# EAGLE board transf_auto6 (EAGLE 5.04)
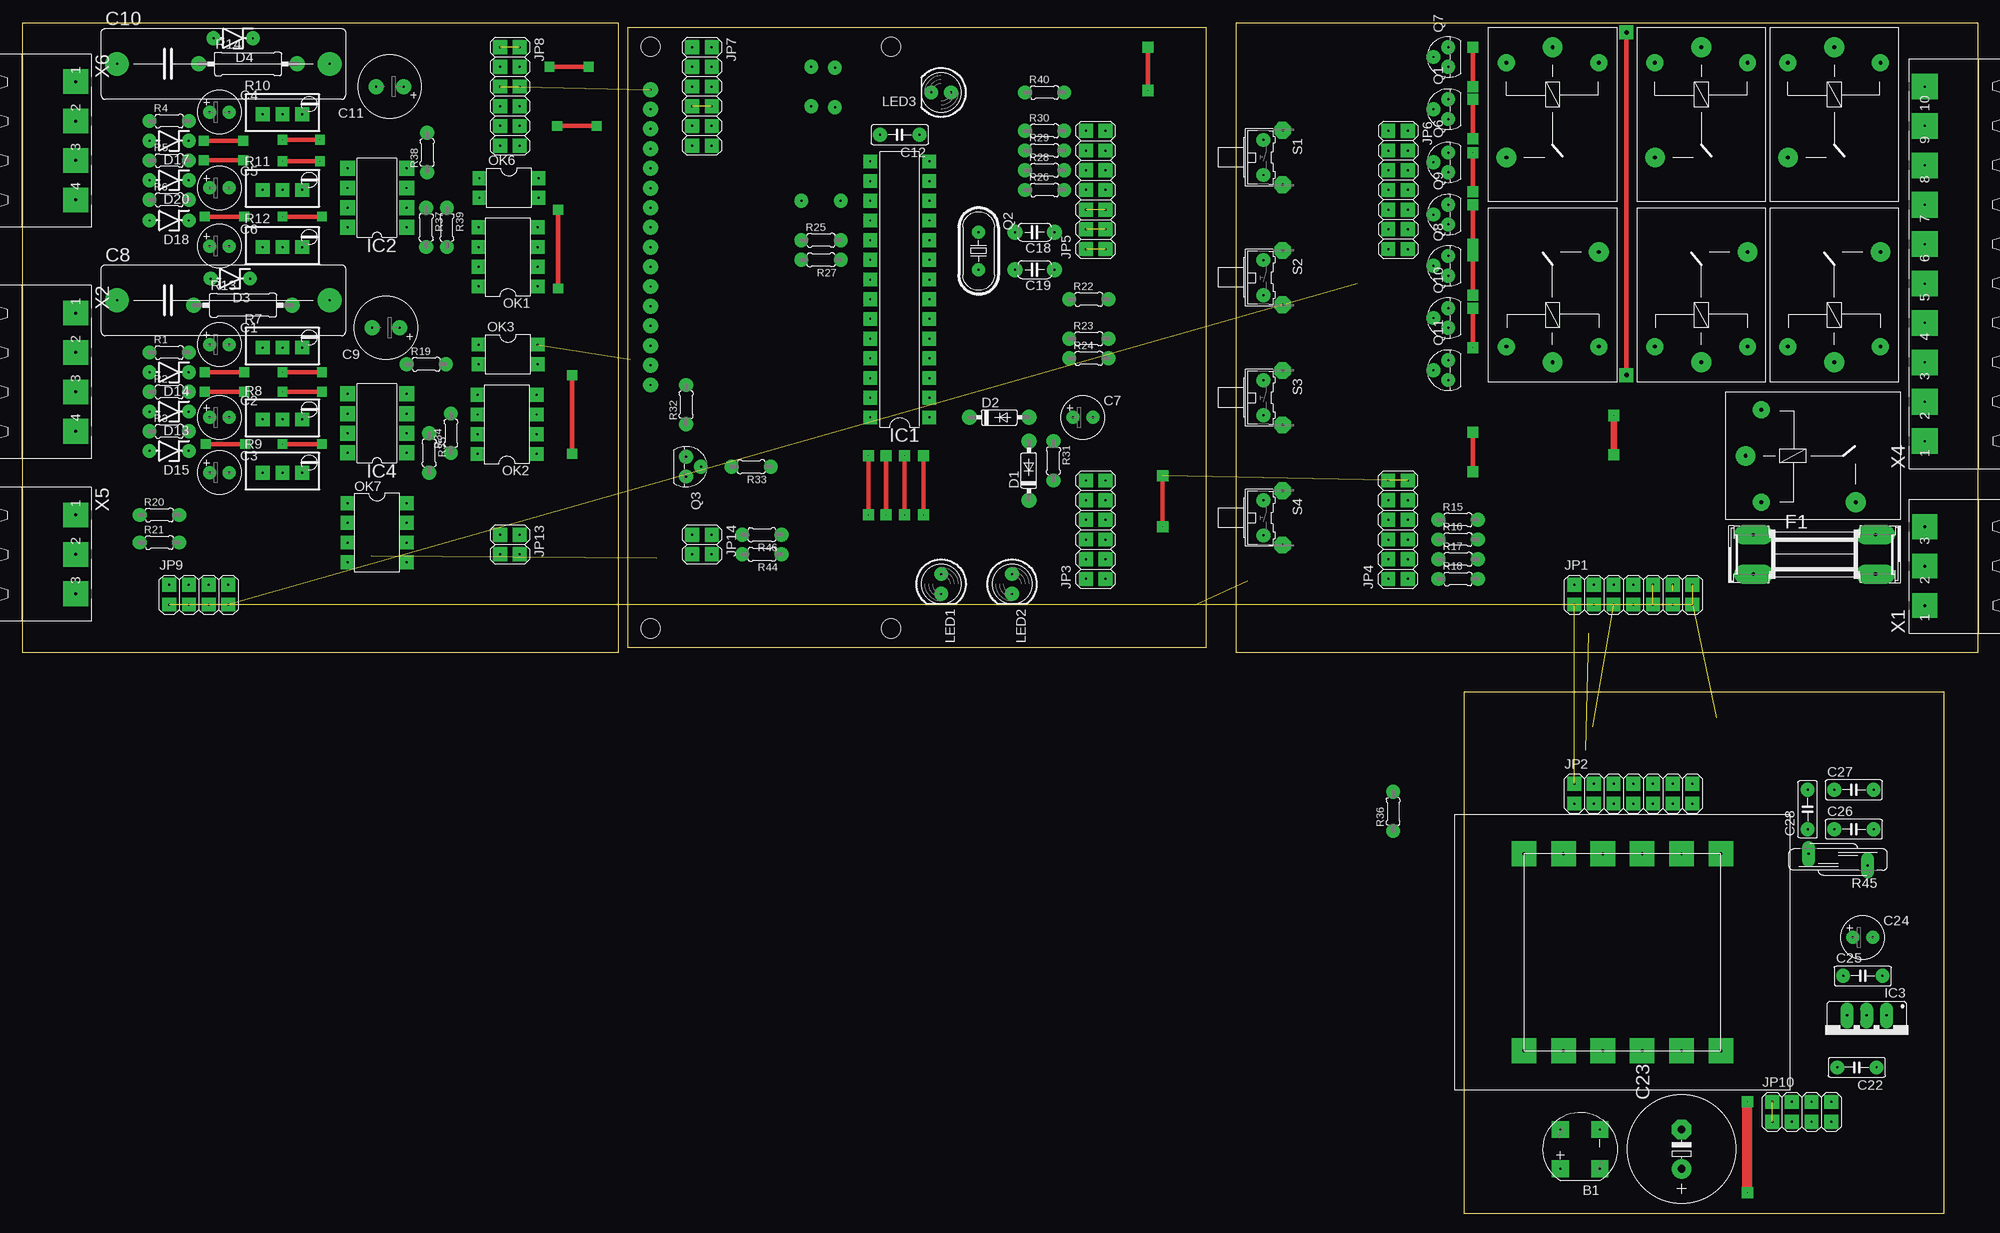
[diagram p0: board, top side]
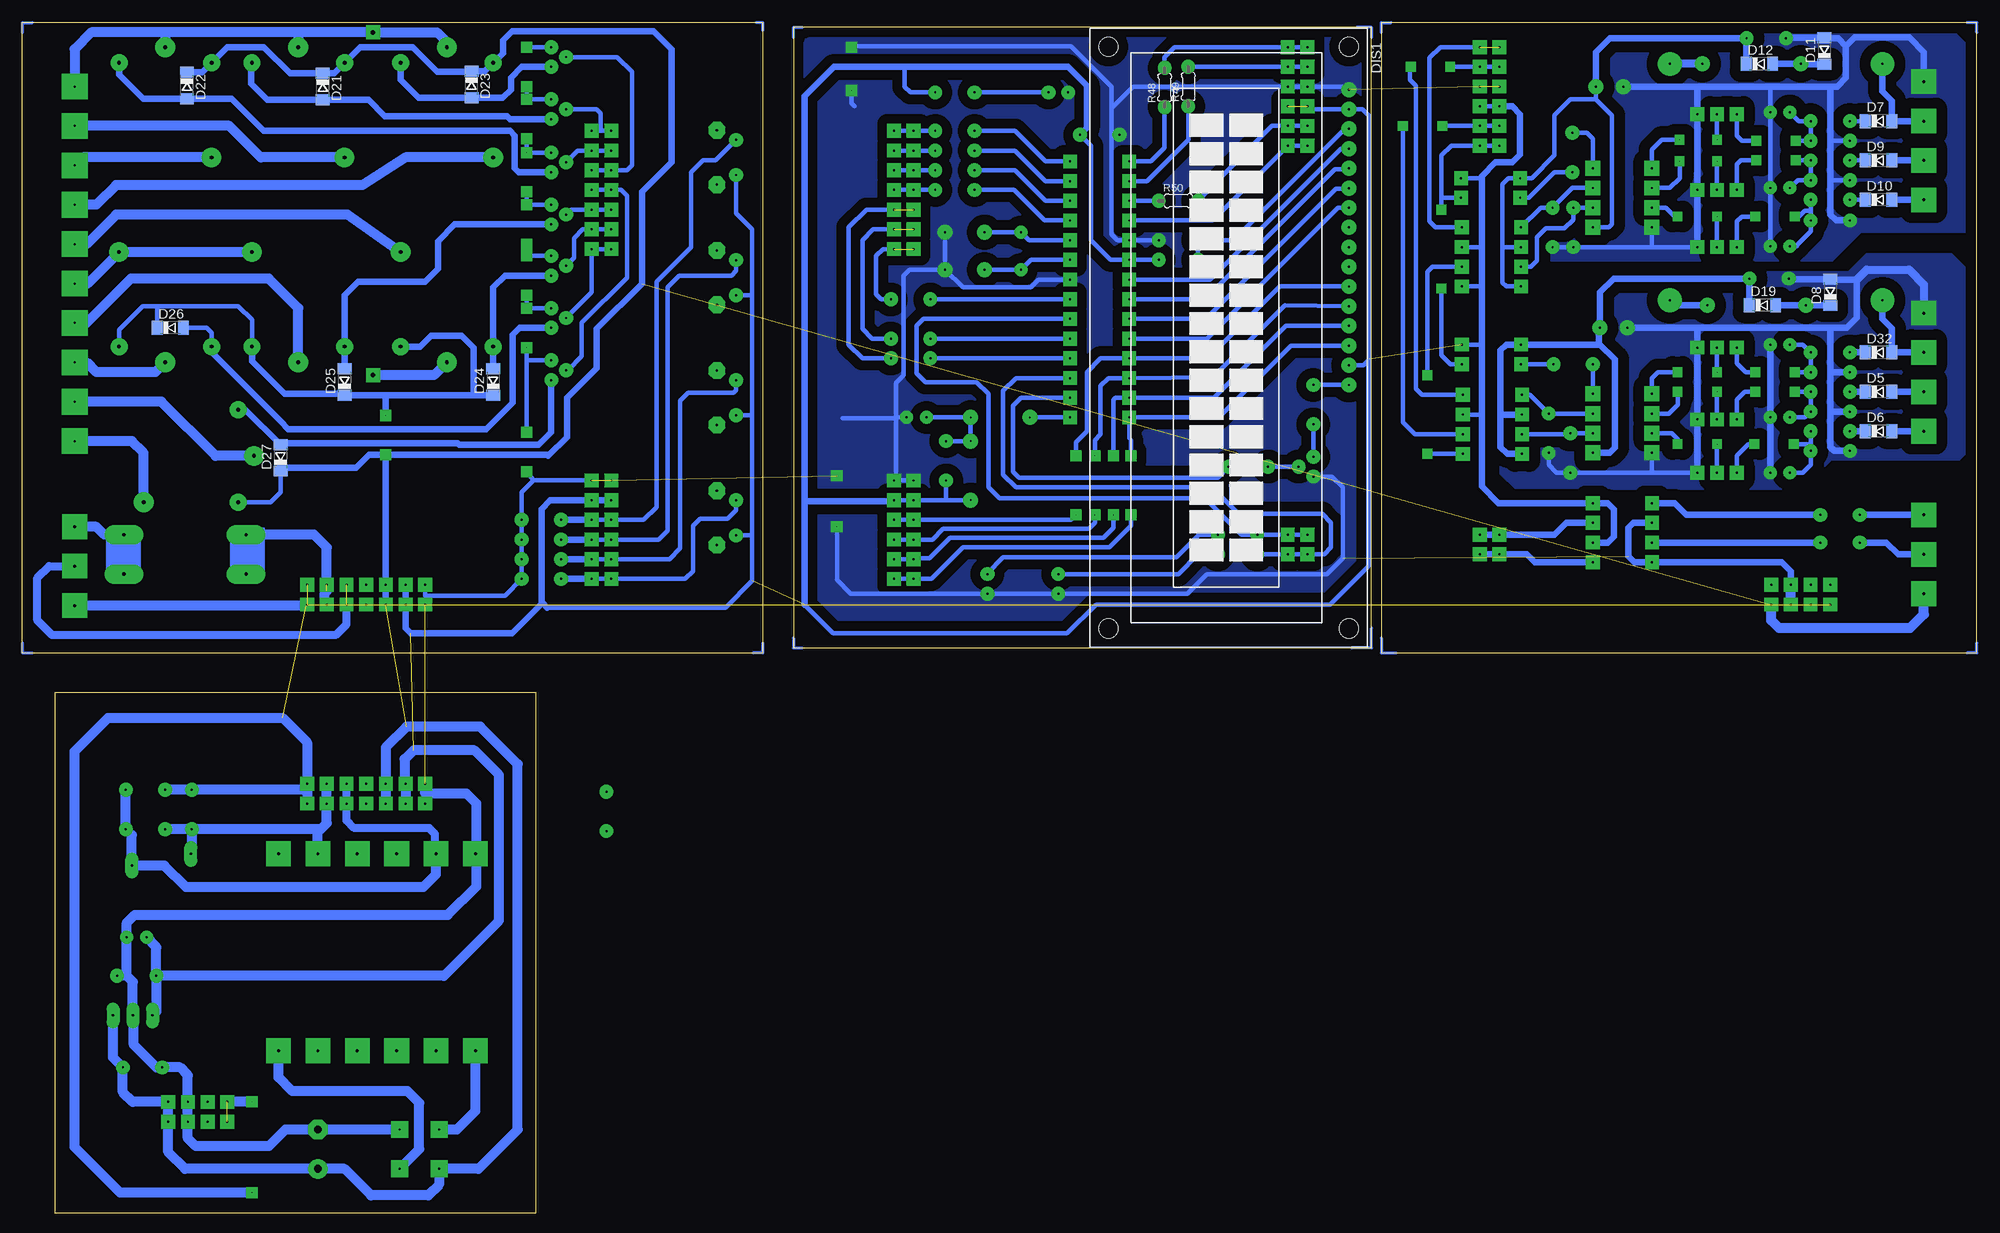
[diagram p1: board, bottom side, seen from below]

Size 252.22 x 153.54 mm. Coordinates in mm from the lower left corner, seen from the top.
Outline: 0,72.26 0,153.54 76.84,153.54 76.84,72.26 0,72.26
Outline: 78.1,72.9 78.1,152.91 152.65,152.91 152.65,72.9 78.1,72.9
Outline: 156.59,72.26 156.59,153.54 252.22,153.54 252.22,72.26 156.59,72.26
Outline: 185.93,67.18 185.93,0 247.9,0 247.9,67.18 185.93,67.18
Copper layers (1*16): Top 0.035mm / dielectric 1.5mm / Bottom 0.035mm
Design rules "default": minimum track width 10mil, minimum drill 24mil, track to track 8mil, track to pad 8mil, pad to pad 8mil, via to via 8mil, smd to smd 8mil, copper to edge 40mil, drill to drill 8mil, minimum pad ring 10mil, minimum via ring 8mil, stop-mask expansion 4mil, vias tented up to drill 0mil, thermal gap 10mil

## Footprints (pad centres in the part's own frame; a part is rotated, then mirrored left to right if it is on the bottom)
RB1A = drill 0.254 pad 2.184 square: + -2.54,2.54; - 2.54,-2.54; AC1 2.54,2.54; AC2 -2.54,-2.54
E2,5-6 = drill 0.254 pad 1.676 round: + -1.27,0; - 1.27,0
C275-093X316 = drill 0.254 pad 3.048 round: 1 -13.716,0; 2 13.716,0
E3,5-8 = drill 0.254 pad 1.93 round: + -1.778,0; - 1.778,0
C050-025X075 = drill 0.254 pad 1.778 round: 1 -2.54,0; 2 2.54,0
C050-024X044 = drill 0.254 pad 1.93 round: 1 -2.54,0; 2 2.54,0
E5-13 = drill 1.016 pad 2.54 round: + -2.54,0 | drill 1.016 pad 2.54 octagon: - 2.54,0
DO35-7 = drill 0.2 pad 1.93 round: A 3.81,0; C -3.81,0
ZDIO-5 = drill 0.254 pad 1.778 round: A 2.54,0; C -2.54,0
SOD80C = smd 1.4 x 1.8: A 1.7,0; C -1.7,0
TUXGR_16X2_R2 = drill 0.254 pad 1.93 round: 1 -32,15.5; 2 -29.46,15.5; 3 -26.92,15.5; 4 -24.38,15.5; 5 -21.84,15.5; 6 -19.3,15.5; 7 -16.76,15.5; 8 -14.22,15.5; 9 -11.68,15.5; 10 -9.14,15.5; 11 -6.6,15.5; 12 -4.06,15.5; 13 -1.52,15.5; 14 1.02,15.5; 15 3.56,15.5; 16 6.1,15.5 | hole 2.5: -37.5,-15.5; 37.5,-15.5; -37.5,15.5; 37.5,15.5
SHK20Q = drill 0.406 pad 2.54 long: 1A -7.874,2.54; 1B -7.874,-2.54; 2A 7.874,2.54; 2B 7.874,-2.54
DIL28-3 = drill 0.254 pad 1.778 square: 1 -16.51,-3.81; 2 -13.97,-3.81; 3 -11.43,-3.81; 4 -8.89,-3.81; 5 -6.35,-3.81; 6 -3.81,-3.81; 7 -1.27,-3.81; 8 1.27,-3.81; 9 3.81,-3.81; 10 6.35,-3.81; 11 8.89,-3.81; 12 11.43,-3.81; 13 13.97,-3.81; 14 16.51,-3.81; 15 16.51,3.81; 16 13.97,3.81; 17 11.43,3.81; 18 8.89,3.81; 19 6.35,3.81; 20 3.81,3.81; 21 1.27,3.81; 22 -1.27,3.81; 23 -3.81,3.81; 24 -6.35,3.81; 25 -8.89,3.81; 26 -11.43,3.81; 27 -13.97,3.81; 28 -16.51,3.81
DIL8 = drill 0.254 pad 1.93 square: 1 -3.81,-3.81; 2 -1.27,-3.81; 3 1.27,-3.81; 4 3.81,-3.81; 5 3.81,3.81; 6 1.27,3.81; 7 -1.27,3.81; 8 -3.81,3.81
78XXS = drill 0.305 pad 1.676 long: GND 0,-2.54; IN -2.54,-2.54; OUT 2.54,-2.54
2X07 = drill 0.254 pad 1.778 square: 1 -7.62,-1.27; 2 -7.62,1.27; 3 -5.08,-1.27; 4 -5.08,1.27; 5 -2.54,-1.27; 6 -2.54,1.27; 7 0,-1.27; 8 0,1.27; 9 2.54,-1.27; 10 2.54,1.27; 11 5.08,-1.27; 12 5.08,1.27; 13 7.62,-1.27; 14 7.62,1.27
2X06 = drill 0.254 pad 1.778 square: 1 -6.35,-1.27; 2 -6.35,1.27; 3 -3.81,-1.27; 4 -3.81,1.27; 5 -1.27,-1.27; 6 -1.27,1.27; 7 1.27,-1.27; 8 1.27,1.27; 9 3.81,-1.27; 10 3.81,1.27; 11 6.35,-1.27; 12 6.35,1.27
2X04 = drill 0.254 pad 1.778 square: 1 -3.81,-1.27; 2 -3.81,1.27; 3 -1.27,-1.27; 4 -1.27,1.27; 5 1.27,-1.27; 6 1.27,1.27; 7 3.81,-1.27; 8 3.81,1.27
2X02 = drill 0.254 pad 1.778 square: 1 -1.27,-1.27; 2 -1.27,1.27; 3 1.27,-1.27; 4 1.27,1.27
LED5MM = drill 0.254 pad 1.778 round: A -1.27,0; K 1.27,0
DIL08 = drill 0.254 pad 1.778 square: 1 -3.81,-3.81; 2 -1.27,-3.81; 3 1.27,-3.81; 4 3.81,-3.81; 5 3.81,3.81; 6 1.27,3.81; 7 -1.27,3.81; 8 -3.81,3.81
DIL04 = drill 0.254 pad 1.778 square: 1 -1.27,-3.81; 2 1.27,-3.81; 3 1.27,3.81; 4 -1.27,3.81
TO92 = drill 0.254 pad 1.778 round: 1 1.27,0; 2 0,1.905; 3 -1.27,0
HC49U70 = drill 0.254 pad 1.676 round: 1 -2.413,0; 2 2.413,0
0204/5 = drill 0.254 pad 1.778 round: 1 -2.54,0; 2 2.54,0
RTRIMT93YA = drill 0.254 pad 1.778 square: 1 0,-2.54; 2 0,0; 3 0,2.54
0309/12 = drill 0.254 pad 1.93 round: 1 -6.35,0; 2 6.35,0
S10K11 = drill 0.305 pad 1.676 long: 1 -0.762,-3.81; 2 0.762,3.81
B3F-31XX = drill 0.254 pad 1.778 round: 1 -2.261,-1.245; 2 2.261,-1.245 | drill 0.305 pad 2.159 octagon: 3 -3.505,1.245; 4 3.505,1.245
943-1A = drill 0.5 pad 2.184 round: P$1 -6.858,5.969; P$2 -6.858,-5.969 | drill 0.5 pad 2.54 round: P$3 -8.89,0; P$4 5.334,-5.969
EI25_12/0-PLACA = drill 0.381 pad 3.175 square: P$1 -12.7,-7.62; P$2 -12.7,7.62; P$3 12.7,-12.7; P$4 12.7,12.7; P$5 -12.7,12.7; P$6 -12.7,-12.7; P$7 -12.7,-2.54; P$8 -12.7,2.54; P$9 12.7,-7.62; P$10 12.7,-2.54; P$11 12.7,2.54; P$12 12.7,7.62
MSTBA3 = drill 0.381 pad 3.175 square: 1 -5.08,5.08; 2 0,5.08; 3 5.08,5.08
MSTBA4 = drill 0.381 pad 3.175 square: 1 -7.62,5.08; 2 -2.54,5.08; 3 2.54,5.08; 4 7.62,5.08
MSTBA10 = drill 0.254 pad 3.302 square: 1 -22.86,5.08; 2 -17.78,5.08; 3 -12.7,5.08; 4 -7.62,5.08; 5 -2.54,5.08; 6 2.54,5.08; 7 7.62,5.08; 8 12.7,5.08; 9 17.78,5.08; 10 22.86,5.08

## Placement (x,y rotation side)
B1  [RB1A]  200.91,8.26 90 top
C1  [E2,5-6]  25.4,112.01 0 top
C2  [E2,5-6]  25.4,102.62 0 top
C3  [E2,5-6]  25.4,95.5 0 top
C4  [E2,5-6]  25.4,141.99 0 top
C5  [E2,5-6]  25.4,132.21 0 top
C6  [E2,5-6]  25.4,124.71 0 top
C7  10uF  [E2,5-6]  136.78,102.62 0 top
C8  [C275-093X316]  25.91,117.73 0 top
C9  [E3,5-8]  46.86,114.17 180 top
C10  [C275-093X316]  25.91,148.21 0 top
C11  [E3,5-8]  47.37,145.29 180 top
C12  104  [C050-025X075]  113.16,139.06 180 top
C18  33PF  [C050-024X044]  130.56,126.49 180 top
C19  33PF  [C050-024X044]  130.56,121.67 180 top
C22  104  [C050-025X075]  236.6,18.8 180 top
C23  1000UF  [E5-13]  214,8.26 90 top
C24  10uF  [E2,5-6]  237.36,35.56 0 top
C25  104  [C050-025X075]  237.36,30.61 0 top
C26  472 1KV  [C050-025X075]  236.22,49.53 0 top
C27  472 1KV  [C050-025X075]  236.22,54.61 0 top
C28  472 1KV  [C050-025X075]  230.25,52.07 90 top
D1  1N4148DO35-7  [DO35-7]  129.79,95.76 90 top
D2  1N4148DO35-7  [DO35-7]  125.98,102.62 0 top
D3  [ZDIO-5]  26.8,120.52 180 top
D4  [ZDIO-5]  27.18,151.51 180 top
D5  [SOD80C]  12.7,105.92 0 bottom
D6  [SOD80C]  12.7,100.84 0 bottom
D7  [SOD80C]  12.7,140.84 0 bottom
D8  [SOD80C]  18.92,118.75 90 bottom
D9  [SOD80C]  12.7,135.76 0 bottom
D10  [SOD80C]  12.7,130.68 0 bottom
D11  [SOD80C]  19.69,149.86 90 bottom
D12  [SOD80C]  28.07,148.21 0 bottom
D13  [ZDIO-5]  18.92,103.38 180 top
D14  [ZDIO-5]  18.92,108.46 180 top
D15  [ZDIO-5]  18.92,98.3 180 top
D17  [ZDIO-5]  18.92,138.3 180 top
D18  [ZDIO-5]  18.92,128.02 180 top
D19  [SOD80C]  27.69,117.09 0 bottom
D20  [ZDIO-5]  18.92,133.22 180 top
D21  [SOD80C]  213.36,145.29 270 bottom
D22  [SOD80C]  230.89,145.42 270 bottom
D23  [SOD80C]  194.18,145.54 270 bottom
D24  [SOD80C]  191.39,107.19 90 bottom
D25  [SOD80C]  210.57,107.19 90 bottom
D26  [SOD80C]  233.04,114.17 0 bottom
D27  [SOD80C]  218.82,97.41 90 bottom
D32  [SOD80C]  12.7,111 0 bottom
DIS1  TUXGR_16X2_R2  [TUXGR_16X2_R2]  96.52,112.9 270 bottom
F1  [SHK20Q]  231.14,84.96 0 top
IC1  PIC16876P  [DIL28-3]  113.16,119.13 90 top
IC2  PIC12F675P  [DIL8]  45.72,130.94 90 top
IC3  7805  [78XXS]  237.87,22.99 180 top
IC4  PIC12F675P  [DIL8]  45.72,101.85 90 top
JP1  [2X07]  207.77,79.76 0 top
JP2  [2X07]  207.77,54.1 0 top
JP3  [2X06]  138.43,88.14 90 top
JP4  [2X06]  177.42,88.14 90 top
JP5  [2X07]  138.43,131.95 90 top
JP6  [2X07]  177.42,131.95 270 top
JP7  [2X06]  87.63,144.02 270 top
JP8  [2X06]  62.87,144.02 270 top
JP9  [2X04]  22.73,79.76 0 top
JP10  [2X04]  229.49,13.08 0 top
JP13  [2X02]  62.87,86.23 270 top
JP14  [2X02]  87.63,86.23 270 top
LED1  [LED5MM]  118.49,81.15 270 top
LED2  [LED5MM]  127.64,81.15 270 top
LED3  [LED5MM]  118.49,144.53 180 top
OK1  ILD621  [DIL08]  62.61,123.32 90 top
OK2  ILD621  [DIL08]  62.48,101.73 90 top
OK3  PC817  [DIL04]  62.61,110.74 270 top
OK6  PC817  [DIL04]  62.74,132.21 270 top
OK7  ILD621  [DIL08]  45.72,87.76 270 top
Q1  BC337  [TO92]  183.9,142.37 90 top
Q2  20MHz  [HC49U70]  123.32,124.08 270 top
Q3  BC337  [TO92]  85.6,96.27 270 top
Q6  BC337  [TO92]  183.9,135.51 90 top
Q7  BC337  [TO92]  183.9,149.1 90 top
Q8  BC337  [TO92]  183.9,122.17 90 top
Q9  BC337  [TO92]  183.9,128.78 90 top
Q10  BC337  [TO92]  183.9,115.44 90 top
Q11  BC337  [TO92]  183.9,108.71 90 top
R1  220K  [0204/5]  18.92,111 0 top
R2  220K  [0204/5]  18.92,105.92 0 top
R3  220K  [0204/5]  18.92,100.84 0 top
R4  220K  [0204/5]  18.92,140.84 0 top
R5  220K  [0204/5]  18.92,135.76 0 top
R6  220K  [0204/5]  18.92,130.68 0 top
R7  10K  [RTRIMT93YA]  33.53,111.63 270 top
R8  10K  [RTRIMT93YA]  33.53,102.36 270 top
R9  10K  [RTRIMT93YA]  33.53,95.5 270 top
R10  10K  [RTRIMT93YA]  33.53,141.73 270 top
R11  10K  [RTRIMT93YA]  33.53,131.95 270 top
R12  10K  [RTRIMT93YA]  33.53,124.59 270 top
R13  [0309/12]  28.45,117.09 0 top
R14  [0309/12]  29.08,148.21 0 top
R15  10K  [0204/5]  185.17,89.41 0 top
R16  10K  [0204/5]  185.17,86.87 0 top
R17  10K  [0204/5]  185.17,84.33 0 top
R18  10K  [0204/5]  185.17,81.79 0 top
R19  1K  [0204/5]  52.07,109.47 0 top
R20  4K7  [0204/5]  17.65,90.04 0 top
R21  4K7  [0204/5]  17.65,86.49 0 top
R22  1K  [0204/5]  137.54,117.86 0 top
R23  1K  [0204/5]  137.54,112.78 0 top
R24  1K  [0204/5]  137.54,110.24 0 top
R25  100  [0204/5]  103,125.48 0 top
R26  1K  [0204/5]  131.83,131.95 0 top
R27  100  [0204/5]  103,122.94 180 top
R28  1K  [0204/5]  131.83,134.49 0 top
R29  1K  [0204/5]  131.83,137.03 0 top
R30  1K  [0204/5]  131.83,139.57 0 top
R31  10K  [0204/5]  132.97,97.03 270 top
R32  100  [0204/5]  85.6,104.27 90 top
R33  1K  [0204/5]  93.98,96.27 180 top
R34  1K  [0204/5]  55.24,100.58 90 top
R35  1K  [0204/5]  52.45,98.04 270 top
R36  [0204/5]  176.78,51.82 90 top
R37  1K  [0204/5]  52.07,127.13 270 top
R38  1K  [0204/5]  52.2,136.78 90 top
R39  1K  [0204/5]  54.74,127.13 270 top
R40  1K  [0204/5]  131.83,144.53 0 top
R44  1K  [0204/5]  95.38,84.96 180 top
R45  S10K11  [S10K11]  234.19,45.59 90 top
R46  1K  [0204/5]  95.38,87.5 180 top
R48  1K  [0204/5]  104.78,145.16 90 bottom
R49  1K  [0204/5]  101.73,145.29 90 bottom
R50  1K  [0204/5]  103,130.56 0 bottom
S1  [B3F-31XX]  161.29,136.14 270 top
S2  [B3F-31XX]  161.29,120.65 270 top
S3  [B3F-31XX]  161.29,105.16 270 top
S4  [B3F-31XX]  161.29,89.66 270 top
U$1  943-1A  [943-1A]  216.53,141.48 270 top
U$2  943-1A  [943-1A]  233.68,141.48 270 top
U$3  943-1A  [943-1A]  197.36,141.48 270 top
U$4  943-1A  [943-1A]  197.36,118.62 90 top
U$5  943-1A  [943-1A]  216.53,118.62 90 top
U$6  943-1A  [943-1A]  233.68,118.62 90 top
U$7  943-1A  [943-1A]  231.14,97.66 0 top
U$18  EI25_12/0  [EI25_12/0-PLACA]  206.38,33.66 270 top
X1  MSTBA3  [MSTBA3]  250.44,83.44 90 top
X2  MSTBA4  [MSTBA4]  1.78,108.46 270 top
X4  MSTBA10  [MSTBA10]  250.44,122.43 90 top
X5  MSTBA3  [MSTBA3]  1.78,84.96 270 top
X6  MSTBA4  [MSTBA4]  1.78,138.3 270 top

## Library data of the parts
B1 = rectifier
C1-C12 C18 C19 C22-C28 R1-R40 R44 R46 R48-R50 = rcl
D1-D15 D17-D27 D32 = diode
DIS1 = display-lcd
F1 = fuse
IC1 IC2 IC4 = microchip
IC3 = v-reg
JP1-JP10 JP13 JP14 = pinhead
LED1-LED3 = led
OK1-OK3 OK6 OK7 = optocoupler
Q1 Q3 Q6-Q11 = transistor-npn
Q2 = crystal
R45 = varistor
S1-S4 = switch-omron
U$1-U$7 = relay
U$18 = trafo
X1 X2 X4-X6 = con-phoenix-508

## Nets
0V: C27.1 C28.2 JP1.13 JP1.14 JP2.13 JP2.14 JP9.1 JP10.1 JP10.2 X1.1
+5V: C12.1 C24.+ C25.1 D1.C DIS1.2 DIS1.15 IC1.20 IC3.OUT JP1.3 JP1.4 JP2.3 JP2.4 JP3.9 JP3.10 JP4.9 JP4.10 JP7.7 JP7.8 JP8.7 JP8.8 OK1.1 OK1.3 OK2.3 OK3.4 OK6.4 OK7.6 OK7.8 R27.1 R31.2 R40.2 S1.2 S2.2 S3.2 S4.2
GND: B1.- C7.- C12.2 C18.1 C19.1 C22.2 C23.- C24.- C25.2 DIS1.1 IC1.8 IC1.19 IC3.GND JP1.1 JP1.2 JP2.1 JP2.2 JP3.11 JP3.12 JP4.11 JP4.12 JP7.5 JP7.6 JP8.5 JP8.6 JP9.5 JP9.6 JP10.5 JP10.6 LED1.K LED2.K LED3.K OK7.2 OK7.4 Q1.1 Q3.1 Q6.1 Q7.1 Q8.1 Q9.1 Q10.1 Q11.1 R15.2 R16.2 R17.2 R18.2 R25.2
N$1: C1.+ D14.C R1.2 R7.1
N$2: C1.- C2.- C3.- C9.- D3.A D8.A D13.A D14.A D15.A IC4.8 R7.3 R8.3 R9.3 R34.1 R35.2 X2.1
N$3: F1.2A X1.3
N$4: C2.+ D13.C R2.2 R8.1
N$5: IC4.5 R7.2
N$6: C3.+ D15.C R3.2 R9.1
N$7: IC4.7 R9.2
N$8: D5.A X2.3
N$9: D6.C R3.1
N$10: D6.A X2.4
N$11: D5.C R2.1
N$12: C8.1 D32.A X2.2
N$13: D32.C R1.1
N$14: D9.A X6.3
N$15: IC4.6 R8.2
N$16: C4.+ D17.C R4.2 R10.1
N$17: B1.AC1 U$18.P$3
N$18: OK3.2 R19.2
N$19: IC4.3 OK2.5 R34.2
N$20: IC4.2 OK2.7 R35.1
N$21: C9.+ D3.C D19.C IC4.1 OK2.6 OK2.8 OK3.1
N$22: C4.- C5.- C6.- C11.- D4.A D11.A D17.A D18.A D20.A IC2.8 R10.3 R11.3 R12.3 R37.2 R39.2 X6.1
N$23: JP8.11 JP8.12 OK3.3 OK6.3
N$24: B1.AC2 U$18.P$4
N$25: C5.+ D20.C R5.2 R11.1
N$26: C8.2 R13.2
N$27: C6.+ D18.C R6.2 R12.1
N$28: D8.C D19.A R13.1
N$29: JP8.3 JP8.4 OK2.4
N$30: D10.C R6.1
N$31: D9.C R5.1
N$32: U$1.P$3 U$2.P$3 U$3.P$3 U$4.P$3 X4.10
N$33: D7.C R4.1
N$34: JP8.9 JP8.10 OK2.2
N$35: C10.1 D7.A X6.2
N$36: D10.A X6.4
N$38: OK6.2 R38.1
N$39: D2.C IC1.1
N$40: C18.2 IC1.10 Q2.1
N$41: JP8.1 JP8.2 OK1.4
N$42: C19.2 IC1.9 Q2.2
N$43: JP6.1 JP6.2 Q1.2
N$44: DIS1.16 R32.2
N$45: DIS1.14 IC1.28 JP3.1 JP3.2
N$47: DIS1.13 IC1.27 JP3.3 JP3.4
N$48: U$18.P$8
N$49: U$3.P$4 X4.7
N$51: U$1.P$4 X4.9
N$52: U$2.P$4 X4.8
N$53: U$5.P$4 U$6.P$4 X4.5
N$54: JP6.3 JP6.4 Q6.2
N$55: JP6.5 JP6.6 Q7.2
N$56: JP6.7 JP6.8 Q11.2
N$57: IC2.5 R10.2
N$58: U$4.P$4 X4.6
N$59: C7.+ D1.A D2.A R31.1
N$60: C26.1 C28.1 JP2.11 JP2.12 R45.2 U$18.P$2
N$61: JP6.9 JP6.10 Q9.2
N$62: U$5.P$3 X4.4
N$63: JP13.1 JP13.2 OK7.7
N$64: IC2.7 R12.2
N$66: JP1.9 JP1.10 X1.2
N$67: LED1.A R44.1
N$68: DIS1.3 R25.1 R27.2
N$71: DIS1.12 IC1.26 JP3.5 JP3.6
N$72: DIS1.11 IC1.25 JP3.7 JP3.8
N$74: DIS1.4 IC1.21
N$75: DIS1.5 IC1.22
N$76: DIS1.6 IC1.23
N$77: IC1.17 R50.1
N$78: IC1.16 R49.1
N$79: IC1.15 R48.1
N$80: F1.1A JP1.11 JP1.12
N$81: DIS1.7 IC1.24
N$82: IC1.18 JP7.11 JP7.12
N$83: IC4.4 R19.1
N$84: JP5.1 JP5.2 R22.2
N$85: LED2.A R46.1
N$86: Q3.3 R32.1
N$87: Q3.2 R33.2
N$88: C26.2 C27.2 JP2.9 JP2.10 R45.1 U$18.P$1
N$90: U$6.P$3 X4.3
N$92: U$7.P$3 X4.2
N$93: JP6.11 JP6.12 Q8.2
N$94: R21.1 X5.2
N$95: JP6.13 JP6.14 Q10.2
N$96: IC1.14 R30.1
N$97: IC1.13 R29.1
N$98: IC1.12 R28.1
N$99: IC1.11 R26.1
N$100: IC1.4 R24.1
N$101: IC1.5 R23.1
N$102: JP4.7 JP4.8 R15.1 S1.1
N$103: JP4.5 JP4.6 R16.1 S2.1
N$104: JP4.3 JP4.4 R17.1 S3.1
N$105: JP4.1 JP4.2 R18.1 S4.1
N$106: IC1.7 R22.1
N$107: R20.1 X5.1
N$118: IC2.2 OK1.7 R37.1
N$119: IC2.4 R38.2
N$120: U$7.P$4 X4.1
N$121: IC2.3 OK1.5 R39.1
N$122: OK7.1 R20.2
N$123: OK7.3 R21.2
N$124: D27.A Q11.3 U$7.P$1
N$125: C11.+ D4.C D12.C IC2.1 OK1.6 OK1.8 OK6.1
N$126: D11.C D12.A R14.1
N$127: C10.2 R14.2
N$128: D26.A Q10.3 U$6.P$1
N$129: IC2.6 R11.2
N$130: IC1.6 JP14.1 JP14.2 R46.2
N$133: D25.A Q9.3 U$5.P$1
N$137: IC1.3 JP14.3 JP14.4 R44.2
N$138: D24.A Q8.3 U$4.P$1
N$139: JP13.3 JP13.4 OK7.5
N$140: D23.A Q7.3 U$3.P$1
N$141: JP5.3 JP5.4 R23.2
N$142: D22.A Q6.3 U$2.P$1
N$143: JP5.5 JP5.6 R24.2
N$144: D21.A Q1.3 U$1.P$1
N$145: JP5.7 JP5.8 R26.2
N$146: JP5.9 JP5.10 R28.2
N$147: JP5.11 JP5.12 R29.2
N$148: JP5.13 JP5.14 R30.2
N$149: OK1.2 OK2.1
N$151: JP7.1 JP7.2 R48.2
N$152: IC1.2 R33.1
N$153: JP7.3 JP7.4 R49.2
N$154: JP7.9 JP7.10 R50.2
N$155: LED3.A R40.1
V+: B1.+ C22.1 C23.+ D21.C D22.C D23.C D24.C D25.C D26.C D27.C IC3.IN JP1.5 JP1.6 JP2.5 JP2.6 JP9.7 JP10.7 JP10.8 U$1.P$2 U$2.P$2 U$3.P$2 U$4.P$2 U$5.P$2 U$6.P$2 U$7.P$2 X5.3

## Tracks (layer width: path | path; a pad name or v marks a point on that pad's centre or on a via)
0V  (via drill 0.01 pad 1.42)  (4 unrouted)
  Top 1.27: v222.5,2.67 v222.5,14.35
  Bottom 1.27: C27.1 C28.2 215.39,54.61 JP2.14 | JP2.14 JP2.13 | X1.1 215.52,78.36 JP1.13 | v222.5,14.35 JP10.2 | v222.5,2.67 239.52,2.67 245.36,8.51 245.36,59.56 241.05,63.88 218.57,63.88 215.39,60.71 JP2.14
+5V  (4 unrouted)
  Bottom 0.61: S1.2 160.05,128.93 157.99,126.87 157.99,118.49 | 157.99,87.38 157.99,81.53 161.42,78.11 184.4,78.11 | 157.99,87.38 157.99,103.12 | 157.99,103.12 157.99,118.49 | S4.2 158.01,87.4 157.99,87.38 | S3.2 158.22,102.89 157.99,103.12 | S2.2 158.09,118.39 157.99,118.49 | JP8.7 JP8.8 | DIS1.15 79.12,109.34 78.49,109.98 | 78.49,109.98 78.36,110.11 78.36,141.48 79.25,142.37 DIS1.2 85.97,142.36 JP7.7 | R27.1 IC1.20 111.76,122.94 114.3,125.48 114.3,137.67 C12.1 | 151.26,78.49 147.57,74.8 117.35,74.8 113.67,78.49 83.44,78.49 78.49,83.44 78.49,109.98 | 139.83,91.82 JP3.9 JP3.10 133.1,91.95 | 133.1,91.95 D1.C | R31.2 132.97,92.08 133.1,91.95 | R40.2 137.54,144.53 138.3,145.29 138.3,147.57 138.56,147.83 | OK6.4 64.13,133.48 63.88,133.35 | 63.88,124.59 OK1.3 | 63.88,119.51 OK1.1 | OK2.3 64.01,103 63.88,102.87 | OK3.4 64.01,112.01 63.88,112.14
  Bottom 0.813: JP8.7 59.94,142.75 58.93,141.73 58.93,136.53 59.94,135.51 62.1,135.51 63.88,133.73 63.88,133.35 63.88,124.59 63.88,119.51 63.88,112.14 63.88,102.87 63.88,93.73 61.72,91.57 OK7.8 47.63,91.57 46.86,90.8 46.86,87.25 47.63,86.49 OK7.6 | JP4.10 JP4.9 184.02,91.95 185.17,90.8 185.17,78.87 185.04,78.74 | 184.4,78.11 185.04,78.74 | JP1.4 JP1.3 202.69,75.44 202.06,74.8 188.98,74.8 185.04,78.74 | 151.26,78.49 151.26,91.82 | 151.26,91.82 139.83,91.82 | 151.26,91.82 151.26,144.02 147.45,147.83 138.56,147.83 117.22,147.83 114.81,145.42 114.81,139.95 C12.1
  Bottom 1.27: JP2.3 JP2.4 202.82,55.5 202.82,58.55 201.68,59.69 193.8,59.69 190.63,56.52 190.63,37.72 197.74,30.61 C25.1 | IC3.OUT 234.82,26.04 C25.1 | C25.1 234.82,34.29 C24.+
GND  (via drill 0.01 pad 1.42)  (6 unrouted)
  Top 0.61: v187.07,145.29 v187.07,150.37 | v187.07,138.56 v187.07,143.64 | v187.07,131.7 v187.07,136.78 | v187.07,124.97 v187.07,130.05 | v187.07,118.36 v187.07,123.44 | v187.07,111.63 v187.07,116.71 | v187.07,95.63 v187.07,100.71 | v147.07,88.52 v147.07,95.12 | v145.16,150.37 v145.16,144.78
  Bottom 0.61: R25.2 IC1.19 110.87,125.48 111.63,126.24 111.63,139.19 | 111.63,142.49 111.63,139.19 | 111.63,142.49 108.84,145.29 JP7.6 JP7.5 81.41,145.29 DIS1.1 | IC1.8 121.03,120.4 122.05,119.38 130.81,119.38 C19.1 | C19.1 C18.1 | 139.45,102.49 139.45,94.74 JP3.11 JP3.12 | 139.45,102.49 139.45,102.62 | C19.1 137.67,121.67 138.43,120.9 138.43,108.08 139.45,107.06 139.45,102.62 | v187.07,150.37 Q7.1 | v187.07,145.29 v187.07,143.64 Q1.1 | v187.07,138.56 v187.07,136.78 Q6.1 | v187.07,131.7 v187.07,130.05 Q9.1 | v187.07,124.97 v187.07,123.44 Q8.1 | v187.07,118.36 v187.07,116.71 Q10.1 | v187.07,100.71 187.07,109.98 | 187.07,109.98 v187.07,111.63 | 186.18,94.49 v187.07,95.63 | 186.18,94.49 JP4.11 | 186.18,94.49 187.71,92.96 R15.2 R16.2 R17.2 R18.2 189.87,79.63 200.03,79.63 | 200.03,79.63 200.15,79.63 JP1.2 | JP1.1 200.03,78.61 200.03,79.63 | 187.07,109.98 Q11.1 | 139.45,102.62 C7.- | v147.07,88.52 147.07,81.66 145.29,79.88 LED2.K LED1.K 101.85,79.88 99.31,82.42 83.82,82.42 81.79,84.45 81.79,93.6 83.19,95 Q3.1 85.47,94.87 | 139.45,102.49 146.3,102.49 | C12.2 111.51,139.06 111.63,139.19 | 111.63,142.49 111.63,145.29 116.84,150.5 145.03,150.5 v145.16,150.37 | v145.16,144.78 145.16,143.13 144.78,142.75
  Bottom 0.813: JP9.6 24,82.8 25.15,83.95 OK7.4 44.2,83.95 44.96,84.71 44.96,88.39 44.32,89.03 OK7.2
  Bottom 1.27: 238.63,30.61 237.87,29.84 IC3.GND 237.74,25.4 237.74,21.72 234.82,18.8 C22.2 231.78,18.8 230.76,17.78 JP10.6 JP10.5 230.76,9.65 229.74,8.64 220.34,8.64 218.19,10.8 C23.- B1.- | 238.63,30.61 C24.- 238.63,37.47 237.62,38.48 197.23,38.48 193.55,42.16 193.55,52.83 194.82,54.1 200.03,54.1 | 238.63,30.61 C25.2 | 200.03,54.1 200.15,54.1 JP2.2 | JP2.1 200.03,52.83 200.03,54.1 | JP9.6 23.88,81.15 23.88,81.41 24,81.28 JP9.6 | JP9.5 JP9.6
  pour Bottom (isolate 1.27, no thermals): 77.47,154.05 77.47,72.77 153.29,72.77 153.29,153.8
N$1  (via drill 0.01 pad 1.27)
  Top 0.61: v23.49,108.46 v28.58,108.46
  Bottom 0.61: v23.49,108.46 D14.C R1.2 22.48,112.01 C1.+ | v28.58,108.46 29.85,108.46 30.99,109.6 R7.1
N$2
  Bottom 0.61: R9.3 41.91,95.5 | 41.91,95.5 IC4.8 | 41.91,95.5 R35.2 54.23,95.5 55.24,96.52 R34.1
  Bottom 0.813: D15.A 18.41,98.3 18.92,98.81 18.92,103.38 | 18.92,108.46 18.92,103.38 | 18.92,108.46 D14.A | 18.92,103.38 D13.A | C3.- C2.- C1.- | R9.3 R8.3 R7.3 36.07,114.17 | 18.92,114.17 18.92,108.46 | 18.92,114.17 36.07,114.17 | 36.07,114.17 C9.- | 18.92,114.17 16.76,114.17 15.49,115.44 15.49,120.4 18.87,120.4 D8.A 24.18,120.45 D3.A
  Bottom 1.016: X2.1 6.86,119.76 8.76,121.67 14.22,121.67 15.49,120.4
  pour Bottom (isolate 1.422, no thermals): 3.56,97.16 18.8,97.16 22.61,93.35 59.44,93.35 61.47,95.38 61.47,113.16 58.8,115.82 53.72,115.82 48.13,121.41 16.51,121.41 14.22,123.7 3.3,123.7 1.14,121.54 1.14,98.3 2.29,97.16
N$3
  Bottom 1.27: F1.2A 241.55,87.5 242.57,88.52 X1.3
N$4  (via drill 0.01 pad 1.27)
  Top 0.61: v23.49,105.92 v28.58,105.92
  Bottom 0.61: v23.49,105.92 R2.2 D13.C 22.23,102.62 C2.+ | v28.58,105.92 29.97,105.92 30.99,104.9 R8.1
N$5  (via drill 0.01 pad 1.27)
  Top 0.61: v33.53,108.46 v38.61,108.46
  Bottom 0.61: R7.2 v33.53,108.46 | v38.61,108.46 41.15,108.46 41.91,107.7 IC4.5
N$6  (via drill 0.01 pad 1.27)
  Top 0.61: v23.62,99.19 v28.7,99.19
  Bottom 0.61: D15.C R3.2 | D15.C 21.46,99.19 v23.62,99.19 | v28.7,99.19 29.46,99.19 30.99,97.66 R9.1 | C3.+ 22.48,95.5 21.46,96.52 D15.C
N$7  (via drill 0.01 pad 1.27)
  Top 0.61: v38.61,99.19 v33.53,99.19
  Bottom 0.61: v33.53,99.19 R9.2 | v38.61,99.19 38.61,99.82 39.37,100.58 IC4.7
N$8
  Bottom 0.813: X2.3 D5.A
N$9
  Bottom 0.813: D6.C R3.1
N$10
  Bottom 0.813: X2.4 D6.A
N$11
  Bottom 0.813: D5.C R2.1
N$12
  Bottom 0.813: X2.2 D32.A 11,114.12 12.19,115.32 C8.1
N$13
  Bottom 0.813: D32.C R1.1
N$14
  Bottom 0.813: X6.3 D9.A
N$15  (via drill 0.01 pad 1.27)
  Top 0.61: v38.61,105.92 v33.53,105.92
  Bottom 0.61: v33.53,105.92 R8.2 | v38.61,105.92 38.61,104.27 39.75,103.12 IC4.6
N$16  (via drill 0.01 pad 1.27)
  Top 0.61: v23.37,138.3 v28.45,138.3
  Bottom 0.61: v28.45,138.3 30.35,138.3 30.99,138.94 R10.1 | v23.37,138.3 D17.C R4.2 22.99,140.84 C4.+
N$17
  Bottom 1.27: B1.AC1 196.09,10.8 193.68,13.21 U$18.P$3
N$18
  Bottom 0.61: R19.2 OK3.2
N$19
  Bottom 0.61: IC4.3 R34.2 57.66,105.54 OK2.5
N$20
  Bottom 0.61: IC4.2 R35.1 52.58,100.46 OK2.7
N$21
  Bottom 0.813: 61.47,103.12 61.47,98.81 60.58,97.92 OK2.8 | 61.47,103.12 61.47,111.25 60.71,112.01 OK3.1 48.77,112.01 | OK2.6 61.34,103 61.47,103.12 | IC4.1 47.37,98.04 46.74,98.68 46.74,110.11 48.64,112.01 48.77,112.01 | D19.C 29.39,120.47 D3.C 46.86,120.52 48.64,118.75 C9.+ 48.77,114.05 48.77,112.01
N$22
  Bottom 0.61: C6.- C5.- C4.- 26.67,145.29 | R12.3 41.78,124.59 | IC2.8 41.91,124.71 41.78,124.59 | 41.78,124.59 R37.2 R39.2 | D17.A 18.92,138.3 18.92,138.68 | D20.A 18.92,133.22 18.92,133.48
  Bottom 0.813: R12.3 R11.3 R10.3 36.07,145.29 | 16.89,150.5 16.89,146.43 18.03,145.29 18.92,145.29 | 16.89,150.5 17.91,151.51 19.64,151.51 D11.A 24.59,151.56 D4.A | 36.07,145.29 26.67,145.29 18.92,145.29 | 36.07,145.29 C11.- | X6.1 6.86,149.73 8.76,151.64 15.75,151.64 16.89,150.5 | D18.A 18.16,128.02 18.92,128.78 18.92,133.48 18.92,138.68 18.92,145.29
  pour Bottom (isolate 1.422, no thermals): 1.65,126.49 14.99,126.49 18.67,122.81 55.75,122.81 57.53,124.59 57.53,150.24 54.61,153.16 3.81,153.16 0.51,149.86 0.51,127.89
N$23  (via drill 0.01 pad 1.27)
  Top 0.61: v69.09,119.25 v69.09,129.41
  Bottom 0.61: JP8.11 JP8.12 67.82,137.67 69.09,136.4 69.09,130.94 | OK3.3 67.94,109.47 69.09,110.62 v69.09,119.25 | 69.09,130.94 OK6.3 | v69.09,129.41 69.09,130.94
N$24
  Bottom 1.27: B1.AC2 200.91,8.26 200.91,14.22 202.44,15.75 217.3,15.75 219.08,17.53 U$18.P$4
N$25  (via drill 0.01 pad 1.27)
  Top 0.61: v23.37,135.76 v28.45,135.76
  Bottom 0.61: v28.45,135.76 30.48,135.76 30.99,135.25 R11.1 | v23.37,135.76 R5.2 D20.C 23.11,133.22 C5.+
N$26
  Bottom 0.813: R13.2 38.99,117.09 C8.2
N$27  (via drill 0.01 pad 1.27)
  Top 0.61: v23.49,128.52 v28.58,128.52
  Bottom 0.61: v28.58,128.52 30.35,128.52 30.99,127.89 R12.1 | C6.+ 23.24,124.71 23.24,124.84 21.46,126.62 D18.C 21.46,129.29 | 21.46,129.29 R6.2 | v23.49,128.52 22.99,128.52 22.23,129.29 21.46,129.29
N$28
  Bottom 0.813: D8.C 18.97,117.09 R13.1 D19.A
N$29  (via drill 0.01 pad 1.27)
  Top 0.61: v73.03,147.83 v67.94,147.83
  Bottom 0.61: JP8.3 JP8.4 v67.94,147.83 | v73.03,147.83 73.15,147.7 73.15,146.18 72.39,145.42 72.39,106.3 71.63,105.54 OK2.4
N$30
  Bottom 0.61: D10.C R6.1
N$31
  Bottom 0.61: D9.C R5.1
N$32  (via drill 0.6 pad 1.78)
  Top 0.61: v206.88,108.08 v206.88,152.27
  Bottom 1.27: U$3.P$3 197.36,151 198.63,152.27 v206.88,152.27 216.53,152.27 | 216.53,152.27 233.68,152.27 | 233.68,152.27 243.21,152.27 245.36,150.11 X4.10 | 233.68,152.27 U$2.P$3 | 216.53,152.27 U$1.P$3 | v206.88,108.08 199.01,108.08 U$4.P$3
N$33
  Bottom 0.61: D7.C R4.1
N$34  (via drill 0.01 pad 1.27)
  Top 0.61: v74.04,140.21 v68.96,140.21
  Bottom 0.61: v68.96,140.21 JP8.10 JP8.9 | OK2.2 72.52,100.46 74.04,101.98 v74.04,140.21
N$35
  Bottom 0.813: X6.2 D7.A 11,143.46 12.19,144.65 C10.1
N$36
  Bottom 0.813: X6.4 D10.A
N$38
  Bottom 0.61: OK6.2 57.79,130.94 54.48,134.24 R38.1
N$39
  Bottom 0.61: IC1.1 D2.C
N$40
  Bottom 0.61: IC1.10 122.3,125.48 Q2.1 C18.2
N$41  (1 unrouted)
  Bottom 0.61: JP8.2 69.22,150.37 70.61,148.97 70.61,127.89 69.85,127.13 OK1.4
N$42
  Bottom 0.61: IC1.9 122.05,122.94 Q2.2 C19.2
N$43
  Bottom 0.61: JP6.1 177.29,139.57 | 177.29,139.57 JP6.2 | Q1.2 178.05,142.37 177.55,141.86 177.55,139.83 177.29,139.57
N$44
  Bottom 0.61: DIS1.16 R32.2
N$45  (via drill 0.01 pad 1.42)
  Top 0.61: v109.09,97.66 v109.09,90.04
  Bottom 0.61: DIS1.14 88.52,111.89 97.79,102.62 IC1.28 109.35,99.95 109.09,99.7 v109.09,97.66 | v109.09,90.04 109.09,88.65 111.89,85.85 130.81,85.85 134.87,81.79 JP3.2 JP3.1
N$47  (via drill 0.01 pad 1.42)
  Top 0.61: v111.38,97.66 v111.38,90.04
  Bottom 0.61: DIS1.13 89.16,114.42 98.43,105.16 IC1.27 111.12,105.16 111.38,104.9 v111.38,97.66 | JP3.3 JP3.4 137.03,84.45 135.13,84.45 132.46,87.12 112.65,87.12 111.38,88.39 v111.38,90.04
N$49
  Bottom 1.27: U$3.P$4 202.69,136.14 208.28,132.59 240.03,132.59 242.57,130.05 X4.7
N$51
  Bottom 1.27: U$1.P$4 221.36,136.14 225.42,140.21 X4.9
N$52
  Bottom 1.27: U$2.P$4 244.35,136.14 X4.8
N$53
  Bottom 1.27: U$5.P$4 U$6.P$4 243.71,119.89 X4.5
N$54
  Bottom 0.61: JP6.3 JP6.4 180.47,137.03 Q6.2
N$55
  Bottom 0.61: Q7.2 175.39,149.1 173.48,147.19 173.48,135.13 174.12,134.49 JP6.5 JP6.6
N$56
  Bottom 0.61: Q11.2 181.74,108.71 179.96,110.49 179.96,114.81 174.12,120.65 174.12,131.19 174.88,131.95 JP6.7 JP6.8
N$57  (via drill 0.01 pad 1.27)
  Top 0.61: v33.53,138.43 v38.35,138.43
  Bottom 0.61: v33.53,138.43 R10.2 | v38.35,138.43 40.64,138.43 41.91,137.16 IC2.5
N$58
  Bottom 1.27: U$4.P$4 210.19,128.78 240.03,128.78 243.84,124.97 X4.6
N$59
  Bottom 0.61: C7.+ D2.A D1.A R31.1
N$60
  Bottom 1.27: C28.1 C26.1 | R45.2 230.25,46.36 C28.1 | JP2.12 JP2.11 212.85,50.29 213.68,49.47 | U$18.P$2 214,49.15 213.68,49.47 | C28.1 213.68,49.53 213.68,49.47
N$61
  Bottom 0.61: Q9.2 181.36,129.41 JP6.10 JP6.9
N$62
  Bottom 1.27: U$5.P$3 216.53,116.71 220.34,120.52 238.13,120.52 243.84,114.81 X4.4
N$63
  Bottom 0.813: JP13.2 JP13.1 54.48,87.5 52.96,89.03 OK7.7
N$64  (via drill 0.01 pad 1.27)
  Top 0.61: v33.53,128.52 v38.61,128.52
  Bottom 0.61: R12.2 v33.53,128.52 | v38.61,128.52 38.99,128.52 40.13,129.67 IC2.7
N$66  (1 unrouted)
  Bottom 1.016: X1.2 248.67,83.44 250.19,81.92 250.19,76.45 248.28,74.55 211.71,74.55 210.31,75.95 JP1.9
N$67
  Bottom 0.61: LED1.A 103,82.42 100.46,84.96 R44.1
N$68
  Bottom 0.61: DIS1.3 81.54,139.82 95.89,125.48 R25.1 R27.2
N$71  (via drill 0.01 pad 1.42)
  Top 0.61: v113.79,97.66 v113.79,90.04
  Bottom 0.61: DIS1.12 89.28,117.09 98.55,107.82 IC1.26 112.01,107.7 113.03,106.68 113.03,100.46 113.79,99.7 v113.79,97.66 | JP3.5 JP3.6 134.75,86.87 133.35,88.27 114.55,88.27 113.79,89.03 v113.79,90.04
N$72  (via drill 0.01 pad 1.42)
  Top 0.61: v116.21,97.66 v116.21,90.04
  Bottom 0.61: DIS1.11 89.92,119.51 99.19,110.24 IC1.25 113.03,110.24 114.81,108.46 114.81,100.84 116.21,99.44 v116.21,97.66 | JP3.7 JP3.8 116.84,89.41 v116.21,90.04
N$74
  Bottom 0.61: DIS1.4 82.05,137.28 98.93,120.4 IC1.21
N$75
  Bottom 0.61: IC1.22 99.57,117.86 82.8,134.62 81.14,134.62 DIS1.5
N$76
  Bottom 0.61: IC1.23 99.44,115.32 82.68,132.08 81.14,132.08 DIS1.6
N$77
  Bottom 0.61: R50.1 IC1.17
N$78
  Bottom 0.61: IC1.16 107.06,133.1 101.73,138.43 R49.1
N$79
  Bottom 0.61: IC1.15 106.55,135.64 104.78,137.41 R48.1
N$80  (1 unrouted)
  Bottom 1.27: F1.1A 214.5,87.5 212.85,85.85 212.85,80.26 213.11,80.01 213.11,78.74 JP1.11
N$81
  Bottom 0.61: IC1.24 99.31,112.78 82.42,129.67 DIS1.7
N$82
  Bottom 0.61: IC1.18 98.55,128.02 JP7.12 JP7.11
N$83
  Bottom 0.61: IC4.4 R19.1
N$84  (1 unrouted)
  Bottom 0.61: JP5.1 141.1,124.33 141.99,123.44 141.99,118.49 141.35,117.86 R22.2
N$85
  Bottom 0.61: LED2.A 127.64,82.55 125.6,84.58 103.25,84.58 100.33,87.5 R46.1
N$86
  Bottom 0.61: Q3.3 R32.1
N$87
  Bottom 0.61: Q3.2 R33.2
N$88
  Bottom 1.016: U$18.P$1 198.88,46.48 198.88,48.9 199.64,49.66 209.3,49.66 210.31,50.67 JP2.9 JP2.10
  Bottom 1.27: U$18.P$1 198.75,43.69 200.41,42.04 231.01,42.04 233.81,44.83 R45.1 238,48.77 C26.2 C27.2
N$89
  Bottom 0.406: 78.1,151.64 78.1,152.91 80.01,152.91
N$90
  Bottom 1.27: U$6.P$3 234.95,108.46 242.57,108.46 243.84,109.73 X4.3
N$91
  Bottom 0.406: 75.56,153.54 76.84,153.54 76.84,152.27
N$92
  Bottom 1.27: U$7.P$3 227.2,97.66 234.19,104.65 X4.2
N$93
  Bottom 0.61: Q8.2 180.97,123.19 180.97,125.73 179.83,126.87 JP6.12 JP6.11
N$94
  Bottom 0.813: X5.2 10.16,84.96 11.68,86.49 R21.1
N$95
  Bottom 0.61: JP6.13 JP6.14 178.69,118.75 Q10.2
N$96
  Bottom 0.61: IC1.14 120.14,135.64 124.08,139.57 R30.1
N$97
  Bottom 0.61: IC1.13 120.14,133.1 124.08,137.03 R29.1
N$98
  Bottom 0.61: IC1.12 120.14,130.56 124.08,134.49 R28.1
N$99
  Bottom 0.61: IC1.11 120.27,128.02 124.21,131.95 R26.1
N$100
  Bottom 0.61: IC1.4 R24.1
N$101
  Bottom 0.61: IC1.5 R23.1
N$102
  Bottom 0.61: JP4.7 JP4.8 171.96,89.41 170.31,91.06 170.31,120.14 165.86,124.59 165.86,134.24 164.34,135.76 162.69,135.76 S1.1
  Bottom 0.813: JP4.7 R15.1
N$103
  Bottom 0.61: JP4.5 JP4.6 170.05,86.87 168.91,88.01 168.91,119.38 167.39,120.9 160.66,120.9 160.05,121.51 S2.1
  Bottom 0.813: JP4.5 R16.1
N$104
  Bottom 0.61: JP4.3 JP4.4 168.66,84.33 167.26,85.73 167.26,104.78 166.24,105.79 160.4,105.79 160.05,106.15 S3.1
  Bottom 0.813: JP4.3 R17.1
N$105
  Bottom 0.61: JP4.1 JP4.2 166.62,81.79 165.61,82.8 165.61,88.65 164.72,89.54 161.16,89.54 160.05,90.65 S4.1
  Bottom 0.813: JP4.1 R18.1
N$106
  Bottom 0.61: IC1.7 R22.1
N$107
  Bottom 0.813: X5.1 R20.1
N$108
  Bottom 0.406: 151.51,152.91 152.65,152.91 152.65,151.64
N$109
  Bottom 0.406: 151.51,72.9 152.65,72.9 152.65,74.17
N$110
  Bottom 0.406: 157.86,72.26 156.59,72.26 156.59,73.53
N$111
  Bottom 0.406: 156.59,152.53 156.59,153.54 157.48,153.54
N$112
  Bottom 0.406: 250.83,72.26 252.09,72.26 252.09,73.53
N$113
  Bottom 0.406: 250.83,153.54 252.09,153.54 252.09,152.27
N$114
  Bottom 0.406: 0,152.27 0,153.54 1.27,153.54
N$115
  Bottom 0.406: 1.27,72.26 0,72.26 0,73.53
N$116
  Bottom 0.406: 74.93,72.26 76.84,72.26 76.84,74.17
N$117
  Bottom 0.406: 80.65,72.9 78.1,72.9 78.1,75.44
N$118
  Bottom 0.61: IC2.2 R37.1 52.07,128.14 53.21,127 55.63,127 56.77,125.86 56.77,122.81 57.53,122.05 OK1.7
N$119
  Bottom 0.61: R38.2 50.29,139.32 49.53,138.56 IC2.4
N$120
  Bottom 1.27: U$7.P$4 236.47,98.04 238,99.57 X4.1
N$121
  Bottom 0.61: OK1.5 56.26,129.67 R39.1 52.2,132.21 IC2.3
N$122
  Bottom 0.813: OK7.1 38.99,91.57 37.46,90.04 R20.2
N$123
  Bottom 0.813: R21.2 OK7.3
N$124
  Bottom 0.813: U$7.P$1 223.34,103.63 D27.A 218.62,99.31 195.96,99.31 195.76,99.11 185.5,99.11 183.9,100.71 Q11.3
N$125
  Bottom 0.61: 61.21,124.46 61.21,120.02 60.71,119.51 OK1.8 | 61.21,124.46 61.21,132.72 60.45,133.48 OK6.1 57.4,133.48 54.48,136.4 54.48,141.61 52.45,143.64 49.15,143.64 | OK1.6 61.09,124.59 61.21,124.46 | 49.15,143.64 C11.+ | 49.15,143.64 47.12,141.61 47.12,127.51 47.5,127.13 IC2.1
  Bottom 0.813: D12.C 29.77,151.46 D4.C 47.37,151.51 49.15,149.73 C11.+
N$126
  Bottom 0.813: D11.C 22.68,148.16 R14.1 D12.A
N$127
  Bottom 1.016: R14.2 C10.2
N$128
  Bottom 0.61: U$6.P$1 227.71,113.54 228.35,114.17 D26.A
  Bottom 0.813: U$6.P$1 227.71,111 218.82,102.11 | Q10.3 187.96,114.17 188.85,113.28 188.85,104.52 192.28,101.09 217.81,101.09 218.82,102.11 | 218.82,102.11 218.57,101.85
N$129  (via drill 0.01 pad 1.27)
  Top 0.61: v33.53,135.64 v38.35,135.64
  Bottom 0.61: R11.2 v33.53,135.64 | v38.35,135.64 38.35,133.48 39.62,132.21 IC2.6
N$130
  Bottom 0.61: JP14.1 JP14.2 R46.2 94.87,87.5 99.57,92.2 126.11,92.2 127.51,93.6 127.51,105.66 129.03,107.19 135.64,107.19 136.78,108.33 136.78,114.43 135.89,115.32 IC1.6
N$133
  Bottom 0.813: D25.A U$5.P$1 210.57,118.36 208.79,120.14 200.15,120.14 198.5,121.79 198.5,125.35 196.34,127.51 Q9.3
N$137
  Bottom 0.61: JP14.4 JP14.3 84.2,84.96 83.31,85.85 83.31,89.03 84.46,90.17 95.25,90.17 98.68,93.6 123.95,93.6 125.6,95.25 125.6,106.05 123.95,107.7 IC1.3 | JP14.4 89.28,84.96 89.41,85.09 | JP14.4 R44.2
N$138
  Bottom 0.813: U$4.P$1 191.34,111.71 | D24.A U$4.P$1 | Q8.3 189.87,120.9 191.39,119.38 U$4.P$1
N$139
  Bottom 0.813: JP13.4 JP13.3 58.04,84.96 57.02,83.95 OK7.5
N$140
  Bottom 0.813: U$3.P$1 203.33,146.18 200.99,143.84 D23.A 190.17,143.84 189.1,144.91 189.1,146.43 187.71,147.83 Q7.3
N$141  (1 unrouted)
  Bottom 0.61: JP5.3 142.37,126.87 143.76,125.48 143.76,114.05 142.49,112.78 R23.2
N$142
  Bottom 0.813: U$2.P$1 239.65,146.81 236.55,143.72 D22.A 225.12,143.72 220.98,139.57 189.23,139.57 188.59,138.94 188.59,134.75 188.09,134.24 Q6.3
N$143  (1 unrouted)
  Bottom 0.61: JP5.5 143.26,129.41 145.54,127.13 145.54,112.01 143.76,110.24 R24.2
N$144
  Bottom 0.813: U$1.P$1 222.63,148.21 222.63,145.67 220.55,143.59 D21.A 207.47,143.59 205.36,141.48 189.61,141.48 189.23,141.1 Q1.3
N$145
  Bottom 0.61: R26.2 JP5.8 JP5.7
N$146
  Bottom 0.61: R28.2 JP5.10 JP5.9
N$147
  Bottom 0.61: R29.2 JP5.12 JP5.11
N$148
  Bottom 0.61: R30.2 JP5.14 JP5.13
N$149  (via drill 0.01 pad 1.27)
  Top 0.61: v70.87,97.92 v70.87,108.08
  Bottom 0.61: OK1.2 70.23,122.05 70.87,121.41 v70.87,108.08 | OK2.1 v70.87,97.92
N$151
  Bottom 0.61: R48.2 104.78,149.1 103.5,150.37 JP7.2 JP7.1
N$152
  Bottom 0.61: 96.9,95.89 R33.1 97.92,94.87 123.57,94.87 124.33,95.63 124.33,104.14 123.32,105.16 IC1.2
N$153
  Bottom 0.61: R49.2 JP7.4 JP7.3
N$154
  Bottom 0.61: R50.2 90.93,140.21 JP7.10 JP7.9
N$155
  Bottom 0.61: LED3.A R40.1
V+  (via drill 0.01 pad 1.42)  (2 unrouted)
  Top 0.813: v205.23,97.79 v205.23,102.87
  Bottom 0.61: U$6.P$2 239.65,113.92 236.6,116.97 234.82,116.97 | 234.82,116.97 224.28,116.97 222.5,115.19 U$5.P$2 | D26.C 234.75,116.89 234.82,116.97 | U$7.P$2 220.09,91.69 218.82,92.96 D27.C | D27.C 218.82,95.89 219.08,96.14 219.08,95.96 D27.C
  Bottom 0.813: U$4.P$2 200.79,111.76 199.39,113.16 195.45,113.16 193.93,111.63 193.93,105.49 | U$5.P$2 222.5,109.86 218.31,105.66 210.74,105.66 D25.C 205.23,105.49 | D22.C 228.93,147.12 U$2.P$2 225.68,150.37 220.98,150.37 217.6,146.99 D21.C 211.91,146.99 U$1.P$2 208.53,150.37 201.8,150.37 198.63,147.19 194.23,147.19 D23.C 192.48,147.24 U$3.P$2 190.12,149.61 190.12,151.26 188.98,152.4 170.69,152.4 168.4,150.11 168.4,135.51 172.21,131.7 172.21,119.89 178.05,114.05 178.05,108.97 181.86,105.16 181.86,100.08 184.28,97.66 184.4,97.79 v205.23,97.79 | 193.93,105.49 D24.C | 202.31,105.49 193.93,105.49 | 205.23,105.49 202.31,105.49 | 202.31,105.49 202.69,105.49 | 219.08,96.14 209.04,96.14 207.39,97.79 v205.23,97.79 | JP1.5 JP1.6 v205.23,97.79 | v205.23,102.87 205.23,105.49
  Bottom 1.27: JP2.5 JP2.6 205.23,60.07 202.56,62.74 193.04,62.74 188.21,57.91 188.21,10.8 193.29,5.72 B1.+ 198.37,3.68 199.77,2.29 207.14,2.29 210.57,5.72 C23.+ 231.14,5.72 233.3,7.87 JP10.7 JP10.8 237.87,14.35 239.14,15.62 C22.1 240.41,20.07 IC3.IN | JP9.7 26.54,76.45 25.53,75.44 8.64,75.44 6.86,77.22 X5.3
(copper drawn outside any net)
  shapes: Bottom area x2

## Text on the board
Bottom: MF_FR_V2 | MF_PE_V1 | MF_PE_V1